# EAGLE board T06_preliminarySchematic_v3 (EAGLE 7.4.0)
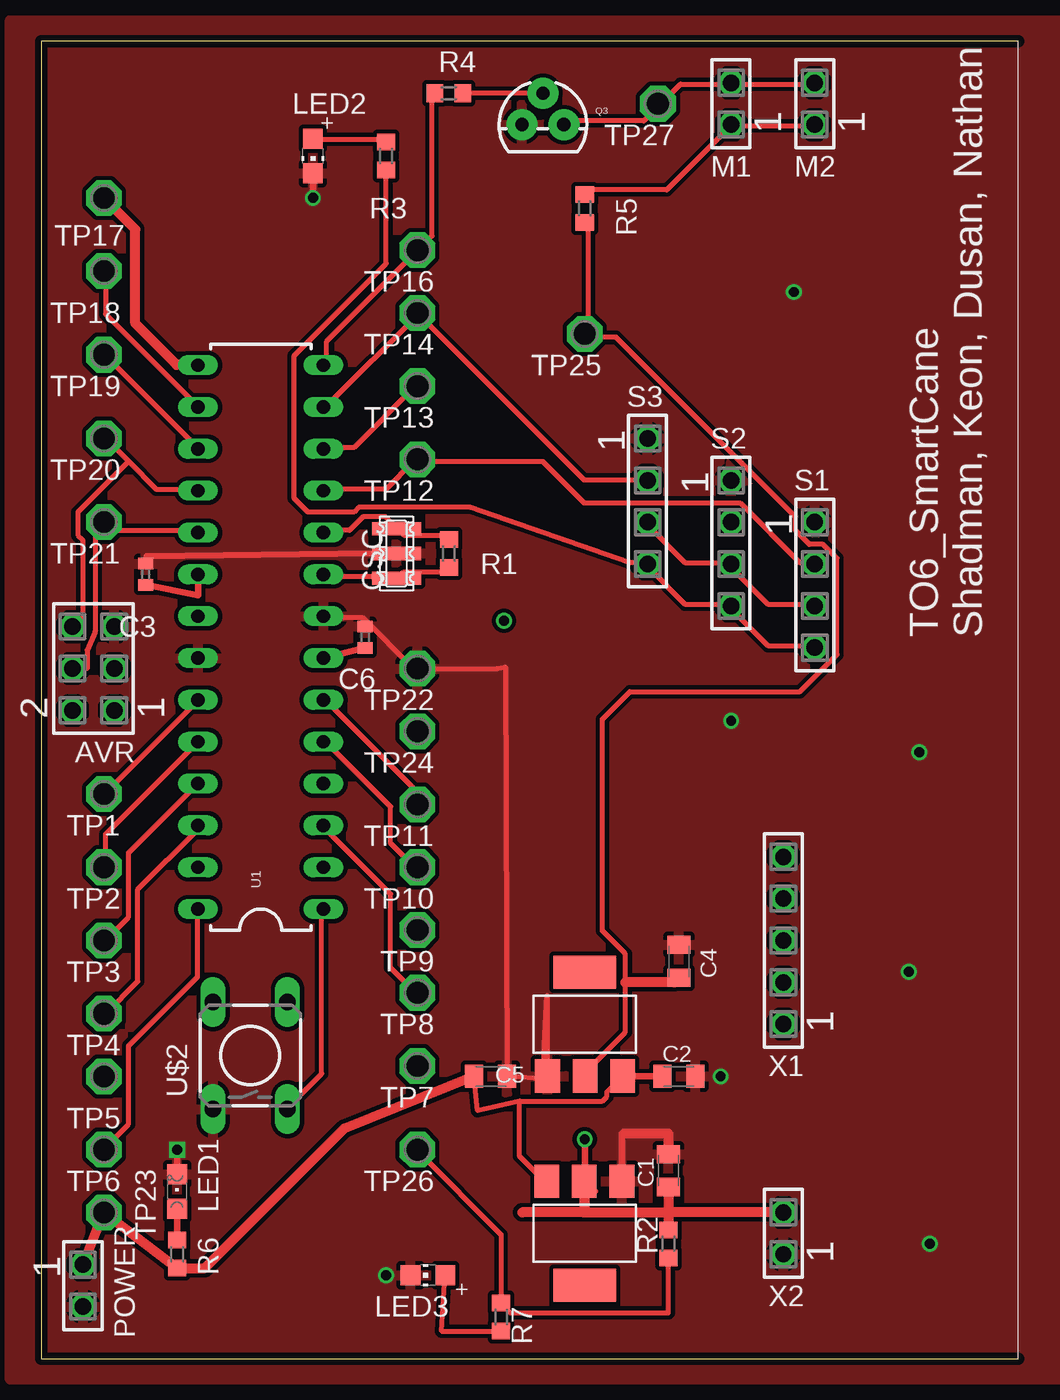
[diagram p0: board, top side]
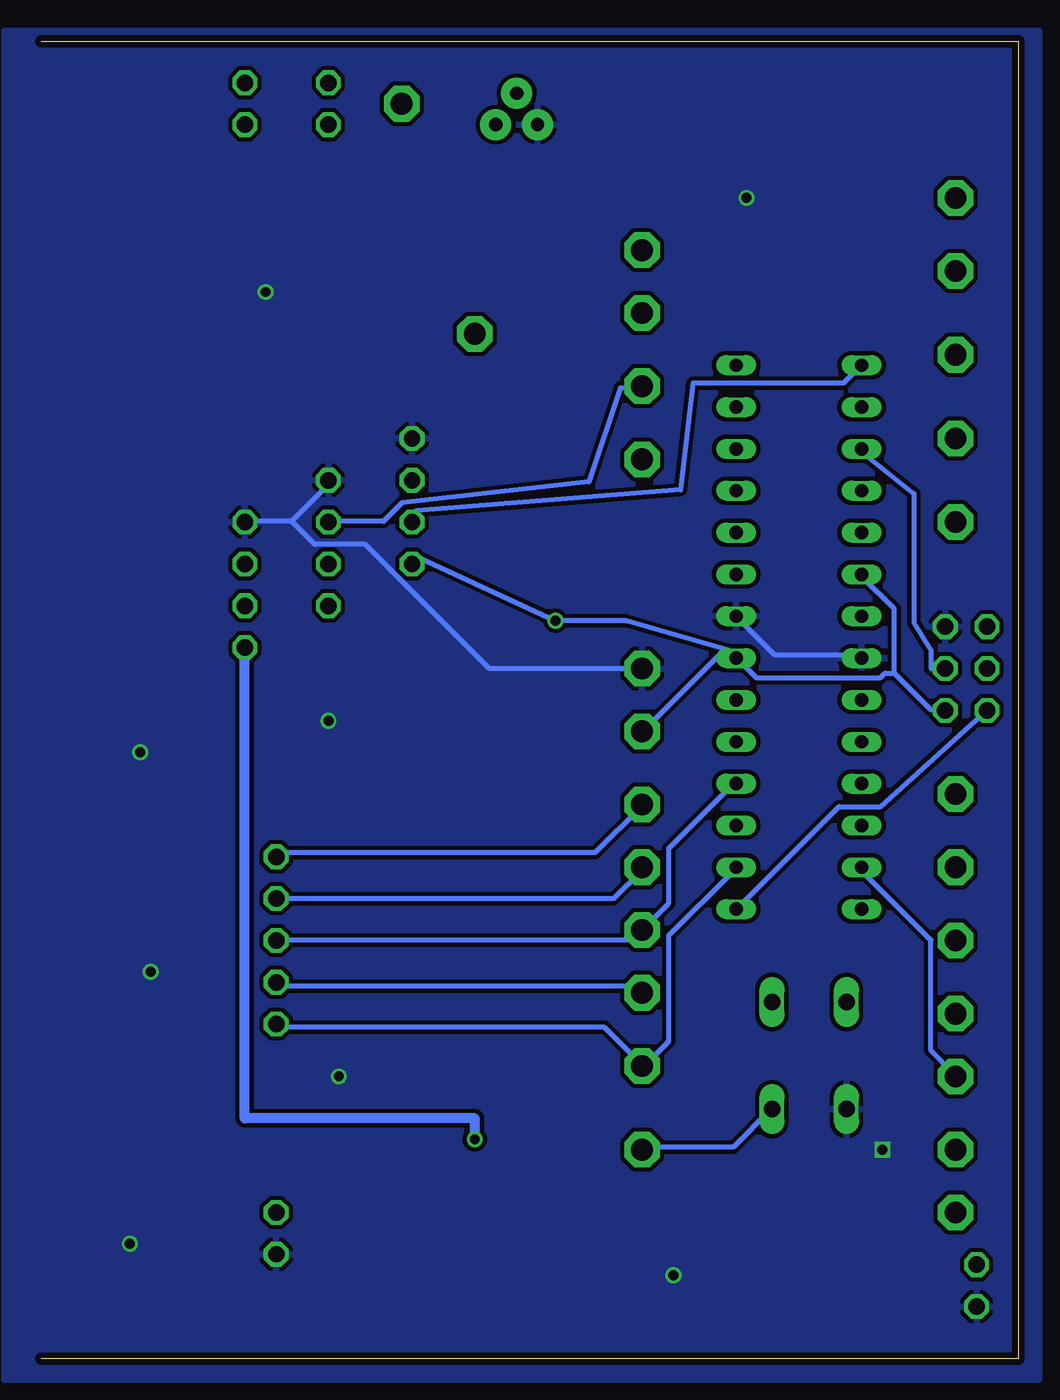
[diagram p1: board, bottom side, seen from below]

Size 59.36 x 80 mm. Coordinates in mm from the lower left corner, seen from the top.
Outline: 59.36,0 0,0 0,80 59.36,80
Copper layers (1*16): Top 0.0356mm / dielectric 1.5011mm / Bottom 0.0356mm
Design rules "LaenPCBOrder (1)": minimum track width 6mil, minimum drill 13mil, track to track 6mil, track to pad 6mil, pad to pad 6mil, via to via 6mil, smd to smd 6mil, copper to edge 15mil, drill to drill 6mil, minimum pad ring 7mil, minimum via ring 7mil, stop-mask expansion 3mil, vias tented up to drill 0mil, thermal gap 10mil
Net classes: 0 default: width 0.305 mm, drill 0.508 mm, clearance 0.254 mm

## Footprints (pad centres in the part's own frame; a part is rotated, then mirrored left to right if it is on the bottom)
SSW-103-02-S-D = drill 1 pad 1.5 octagon: 1 -2.54,-1.27; 2 -2.54,1.27; 3 0,-1.27; 4 0,1.27; 5 2.54,-1.27; 6 2.54,1.27
C0805K = smd 1.1 x 1.4: 1 -1,0; 2 1,0
C1005 = smd 0.7 x 0.9: 1 -0.65,0; 2 0.65,0
CSTCR-G = smd 0.8 x 3: 1 -1.5,0; 2 0,0; 3 1.5,0
CHIPLED_0805 = smd 1.2 x 1.2: A 0,-1.05; C 0,1.05
CHIP-LED0805 = smd 1.2 x 1.2: A 0,-1.05; C 0,1.05
SSW-102-02-S-S = drill 1 pad 1.5 octagon: 1 -1.27,0; 2 1.27,0
SOT223 = smd 1.499 x 2.007: 1 -2.261,-3.15; 2 0.025,-3.15; 3 2.311,-3.15 | smd 3.81 x 2.007: 4 0,3.15
TO-92 = drill 0.813 pad 1.88: 1 -1.27,0; 2 0,1.905; 3 1.27,0
R0603 = smd 1 x 1.1: 1 -0.85,0; 2 0.85,0
SSW-104-02-S-S = drill 1 pad 1.5 octagon: 1 -3.81,0; 2 -1.27,0; 3 1.27,0; 4 3.81,0
P1-13 = drill 1.321 pad 2.159 octagon: TP 0,0
DIL28-3 = drill 0.813 long: 1 -16.51,-3.81; 2 -13.97,-3.81; 3 -11.43,-3.81; 4 -8.89,-3.81; 5 -6.35,-3.81; 6 -3.81,-3.81; 7 -1.27,-3.81; 8 1.27,-3.81; 9 3.81,-3.81; 10 6.35,-3.81; 11 8.89,-3.81; 12 11.43,-3.81; 13 13.97,-3.81; 14 16.51,-3.81; 15 16.51,3.81; 16 13.97,3.81; 17 11.43,3.81; 18 8.89,3.81; 19 6.35,3.81; 20 3.81,3.81; 21 1.27,3.81; 22 -1.27,3.81; 23 -3.81,3.81; 24 -6.35,3.81; 25 -8.89,3.81; 26 -11.43,3.81; 27 -13.97,3.81; 28 -16.51,3.81
TAC-SWITCH-PTH = drill 1.016 pad 1.524 long: 1 -3.251,2.261; 2 3.251,2.261; 3 -3.251,-2.261; 4 3.251,-2.261
SSW-105-02-S-S = drill 1 pad 1.5 octagon: 1 -5.08,0; 2 -2.54,0; 3 0,0; 4 2.54,0; 5 5.08,0

## Placement (x,y rotation side)
AVR  SSW-103-02-S-D  [SSW-103-02-S-D]  3.17,41.91 90 top
C1  10u  [C0805K]  38.1,11.43 90 top
C2  10u  [C0805K]  38.73,17.14 0 top
C3  100n  [C1005]  6.35,47.62 90 top
C4  10u  [C0805K]  38.73,24.13 90 top
C5  10u  [C0805K]  27.3,17.14 0 top
C6  100n  [C1005]  19.68,43.81 90 top
CSC  16M  [CSTCR-G]  21.59,48.9 90 top
LED1  LTST-C171GKT  [CHIPLED_0805]  8.26,10.16 0 top
LED2  LTST-C171GKT  [CHIP-LED0805]  16.51,73.03 180 top
LED3  LTST-C170KFKT  [CHIP-LED0805]  23.5,5.08 90 top
M1  SSW-102-02-S-S  [SSW-102-02-S-S]  41.91,76.2 90 top
M2  SSW-102-02-S-S  [SSW-102-02-S-S]  46.99,76.2 90 top
NCP1117DT33T5GOSTR-ND  REG1117  [SOT223]  33.02,20.32 0 top
NCP1117DT50RKGOSTR-ND  REG1117  [SOT223]  33.02,7.62 180 top
POWER  SSW-102-02-S-S  [SSW-102-02-S-S]  2.54,4.45 270 top
Q3  2n3904  [TO-92]  30.48,74.93 0 top
R1  1M  [R0603]  24.77,48.9 270 top
R2  10K  [R0603]  38.1,6.99 90 top
R3  220  [R0603]  20.95,73.03 90 top
R4  500  [R0603]  24.77,76.83 0 top
R5  100  [R0603]  33.02,69.85 270 top
R6  220  [R0603]  8.26,6.35 90 top
R7  220  [R0603]  27.94,2.54 270 top
S1  SSW-104-02-S-S  [SSW-104-02-S-S]  46.99,46.99 270 top
S2  SSW-104-02-S-S  [SSW-104-02-S-S]  41.91,49.53 270 top
S3  SSW-104-02-S-S  [SSW-104-02-S-S]  36.83,52.07 270 top
TP1  TPPAD1-13  [P1-13]  3.81,34.29 180 top
TP2  TPPAD1-13  [P1-13]  3.81,29.84 180 top
TP3  TPPAD1-13  [P1-13]  3.81,25.4 180 top
TP4  TPPAD1-13  [P1-13]  3.81,20.95 180 top
TP5  TPPAD1-13  [P1-13]  3.81,17.14 180 top
TP6  TPPAD1-13  [P1-13]  3.81,12.7 180 top
TP7  TPPAD1-13  [P1-13]  22.86,17.78 180 top
TP8  TPPAD1-13  [P1-13]  22.86,22.23 180 top
TP9  TPPAD1-13  [P1-13]  22.86,26.04 180 top
TP10  TPPAD1-13  [P1-13]  22.86,29.84 180 top
TP11  TPPAD1-13  [P1-13]  22.86,33.66 180 top
TP12  TPPAD1-13  [P1-13]  22.86,54.61 180 top
TP13  TPPAD1-13  [P1-13]  22.86,59.05 180 top
TP14  TPPAD1-13  [P1-13]  22.86,63.5 180 top
TP16  TPPAD1-13  [P1-13]  22.86,67.31 180 top
TP17  TPPAD1-13  [P1-13]  3.81,70.48 90 top
TP18  TPPAD1-13  [P1-13]  3.81,66.04 180 top
TP19  TPPAD1-13  [P1-13]  3.81,60.96 180 top
TP20  TPPAD1-13  [P1-13]  3.81,55.88 180 top
TP21  TPPAD1-13  [P1-13]  3.81,50.8 180 top
TP22  TPPAD1-13  [P1-13]  22.86,41.91 180 top
TP23  TPPAD1-13  [P1-13]  3.81,8.89 180 top
TP24  TPPAD1-13  [P1-13]  22.86,38.1 180 top
TP25  TPPAD1-13  [P1-13]  33.02,62.23 180 top
TP26  TPPAD1-13  [P1-13]  22.86,12.7 180 top
TP27  TPPAD1-13  [P1-13]  37.47,76.2 180 top
U1  ATMEGA328P_PDIP  [DIL28-3]  13.34,43.81 90 top
U$2  TACTILE-SWITCH-PTH  [TAC-SWITCH-PTH]  12.7,18.41 90 top
X1  SSW-105-02-S-S  [SSW-105-02-S-S]  45.09,25.4 90 top
X2  SSW-102-02-S-S  [SSW-102-02-S-S]  45.09,7.62 90 top

## Library data of the parts
AVR = con-samtec; MPN: SSW-103-02-S-D; OC_FARNELL: unknown; OC_NEWARK: 11P9365
C1 C2 C4 C5 CSC LED1-LED3 = adafruit
C3 C6 = eagle-ltspice; SPICEMODEL: NONE; SPICEPREFIX: C
M1 M2 POWER X2 = con-samtec; MPN: SSW-102-02-S-S; OC_FARNELL: unknown; OC_NEWARK: 11P9351
NCP1117DT33T5GOSTR-ND NCP1117DT50RKGOSTR-ND = burr-brown; MPN: REG1117; OC_FARNELL: 1097566; OC_NEWARK: 14P6981
Q3 = SparkFun-DiscreteSemi; PROD_ID: TRANS-08447
R1-R7 = eagle-ltspice; SPICEMODEL: NONE; SPICEPREFIX: R
S1-S3 = con-samtec; MPN: SSW-104-02-S-S; OC_FARNELL: unknown; OC_NEWARK: 11P9384
TP1-TP14 TP16-TP27 = testpad
U1 = SparkFun-DigitalIC
U$2 = GeekAmmo
X1 = con-samtec; MPN: SSW-105-02-S-S; OC_FARNELL: unknown; OC_NEWARK: 11P9399

## Nets
+3V3: C4.1 NCP1117DT33T5GOSTR-ND.2 R5.2 TP25.TP
+5V: AVR.1 C1.1 C3.1 C6.1 NCP1117DT50RKGOSTR-ND.2 R2.2 R3.1 S1.4 S2.4 S3.4 TP24.TP U1.7 U1.20 X2.2
+9V: C2.1 C5.1 NCP1117DT33T5GOSTR-ND.3 NCP1117DT50RKGOSTR-ND.3 POWER.1 R6.1 TP23.TP
BU0: TP7.TP U1.2 X1.1
BU1: TP8.TP U1.3 X1.2
BU2: TP9.TP U1.4 X1.3
BU3: TP10.TP U1.5 X1.4
BU4: TP11.TP U1.6 X1.5
D16: TP18.TP U1.16
ECHO1: S1.2 TP12.TP U1.11
ECHO2: S2.2 TP13.TP U1.12
ECHO3: S3.2 TP14.TP U1.13
GND: AVR.5 C1.2 C2.2 C3.2 C4.2 C5.2 C6.2 CSC.2 LED1.C LED2.C LED3.C NCP1117DT33T5GOSTR-ND.1 NCP1117DT50RKGOSTR-ND.1 POWER.2 Q3.1 S1.1 S2.1 S3.1 TP22.TP U1.8 U1.22 U$2.1 X2.1
MISO: AVR.6 TP20.TP U1.18
MOSI: AVR.3 TP19.TP U1.17
MOTOR: R4.1 TP16.TP U1.14
N$1: CSC.3 R1.1 U1.10
N$2: CSC.1 R1.2 U1.9
N$3: TP1.TP U1.23
N$4: TP2.TP U1.24
N$5: M1.1 M2.1 R5.1
N$6: TP3.TP U1.25
N$7: LED1.A R6.2
N$8: LED2.A R3.2
N$9: LED3.A R7.2
N$10: Q3.2 R4.2
N$11: M1.2 M2.2 Q3.3 TP27.TP
N$12: TP4.TP U1.26
N$13: TP5.TP U1.27
N$14: TP6.TP U1.28
RESET: AVR.2 R2.1 R7.1 TP26.TP U1.1 U$2.3
SCK: AVR.4 TP21.TP U1.19
TRIG: S1.3 S2.3 S3.3 TP17.TP U1.15

## Tracks (layer width: path | path; a pad name or v marks a point on that pad's centre or on a via)
+3V3
  Top 0.305: R5.2 33.25,68.73 33.25,62.31 TP25.TP 33.25,62.03 34.92,62.03 45.82,51.13 45.82,50.29 46.66,49.45 47.5,49.45 48.34,48.62 48.34,42.75 46.1,40.51 35.76,40.51 34.09,38.84 34.09,25.98 35.48,24.59 35.48,22.86 35.48,19.84 32.97,17.32 NCP1117DT33T5GOSTR-ND.2
  Top 0.406: C4.1 38.47,22.86
  Top 0.61: 38.47,22.86 35.48,22.86
+5V  (via drill 0.6 pad 0.61, 0.61)
  Top 0.305: 32.97,10.62 NCP1117DT50RKGOSTR-ND.2 | R3.1 20.95,66.5 15.37,60.91 15.37,52.25 16.2,51.41 19,51.41 19.28,51.69 26.06,51.69 35.76,48.34 36.6,48.34 S3.4 36.88,48.06 39.12,45.82 41.91,45.82 S2.4 41.91,45.54 44.15,43.31 46.94,43.31 S1.4 | 9.53,46.35 9.51,46.37
  Top 0.406: C3.1 9.51,46.37 | 9.53,46.35 U1.20 | C6.1 U1.7 | NCP1117DT50RKGOSTR-ND.2 33.6,10.16 33.66,10.16 33.02,10.79 v33.02,13.34
  Top 0.61: C1.1 38.1,8.89 | 38.1,8.89 R2.2 | 32.97,10.62 32.97,8.89 38.1,8.89 | NCP1117DT50RKGOSTR-ND.2 32.99,8.89 29.21,8.89 | X2.2 38.1,8.89 | C3.1
  Bottom 0.305: 7.54,41.63 7.54,45.54 9.5,47.5 U1.20 | 7.54,41.63 5.31,39.4 AVR.1 | 17.6,43.03 17.32,42.75 U1.7 | 17.6,43.03 23.82,44.81 v28.12,44.81 36.32,48.62 36.6,48.34 S3.4 | 17.6,43.03 17.88,43.03 22.63,38.28 TP24.TP | 17.6,43.03 U1.7 | 7.54,41.63 8.1,41.63 8.38,41.35 15.93,41.35 17.04,42.47 U1.7
  Bottom 0.61: v33.02,13.34 33.02,14.61 46.99,14.61 S1.4
+9V
  Top 0.305: 29.06,15.65 29.06,12.29 30.45,10.9 NCP1117DT50RKGOSTR-ND.3 | 29.06,15.65 26.52,15.06 C5.1 | NCP1117DT33T5GOSTR-ND.3 34.37,16.2 34.37,15.93 34.09,15.65 29.06,15.65
  Top 0.406: NCP1117DT33T5GOSTR-ND.3 37.1,17.17 C2.1
  Top 0.61: C5.1 18.41,13.97 9.95,5.5 R6.1 TP23.TP POWER.1
BU0
  Bottom 0.305: U1.2 17.32,29.62 21.23,25.7 21.23,19.28 22.63,17.88 TP7.TP 22.91,17.88 25.15,20.12 44.98,20.12 X1.1
BU1
  Top 0.305: U1.3 17.32,32.13 21.23,28.22 21.23,23.75 22.63,22.35 TP8.TP
  Bottom 0.305: X1.2 44.98,22.63 23.19,22.63 22.91,22.35 TP8.TP
BU2
  Bottom 0.305: U1.4 17.32,34.92 21.23,31.01 21.23,27.66 TP9.TP 23.47,25.43 44.98,25.43 X1.3
BU3
  Top 0.305: U1.5 17.32,37.44 21.23,33.53 21.23,31.29 22.63,29.9 TP10.TP
  Bottom 0.305: X1.4 24.59,27.94 22.91,29.62 TP10.TP
BU4
  Top 0.305: U1.6 17.32,39.95 22.63,34.65 22.63,33.81 TP11.TP
  Bottom 0.305: X1.5 44.98,30.73 25.7,30.73 22.91,33.53 TP11.TP
D16
  Top 0.305: U1.16 9.5,57.84 3.91,63.42 3.91,65.94 TP18.TP
ECHO1
  Top 0.305: U1.11 17.32,52.81 20.95,52.81 22.63,54.48 TP12.TP 22.91,54.48 30.45,54.48 32.97,51.97 42.47,51.97 46.1,48.34 46.94,48.34 S1.2
ECHO2
  Top 0.305: U1.12 17.32,55.32 19,55.32 22.63,58.95 TP13.TP
  Bottom 0.305: S2.2 41.91,50.85 38.56,50.85 37.44,51.97 26.09,53.24 24.18,58.95 TP13.TP
ECHO3
  Top 0.305: 22.91,63.42 17.32,57.84 U1.13 | 22.91,63.42 32.97,53.37 36.6,53.37 S3.2 | 22.91,63.42 TP14.TP
GND  (via drill 0.6)
  Top 0.305: 35.48,10.9 NCP1117DT50RKGOSTR-ND.1 | CSC.2 20.34,48.9 | 6.4,48.74 C3.2 | 16.48,72.08 LED2.C | NCP1117DT33T5GOSTR-ND.1 30.73,17.32 30.73,22.07 30.45,16.64 31.09,16.69 30.73,16.97 C5.2 28.19,42.01 27.66,41.91 TP22.TP 22.63,41.91 19.56,44.98 17.32,44.98 U1.8
  Top 0.406: LED1.C v8.26,12.7 | LED2.C v16.51,70.48 | 35.42,13.69 35.28,13.69 NCP1117DT50RKGOSTR-ND.1 | 6.4,48.74 20.34,48.9
  Top 0.61: 35.42,13.69 38.1,13.69 C1.2
  Bottom 0.305: 44.15,50.85 46.94,50.85 S1.1 | 44.15,50.85 41.91,53.09 S2.1 | 10.62,15.09 U$2.1 | U1.8 14.81,42.75 9.78,42.75 U1.22 | 44.15,50.85 42.75,49.45 39.67,49.45 32.13,41.91 TP22.TP
  other vias: 41.27,17.14 41.91,38.73 20.95,5.08 53.34,36.83 52.7,23.5 53.98,6.99 45.72,64.77
  pour Bottom: -1.27,80.64 61.59,80.64 61.59,-1.27 -1.27,-1.27 -1.27,1.91
  pour Top: -1.91,81.28 62.23,81.28 62.23,-1.27 -1.91,-1.27 -1.91,-0.64 -1.91,80.64
MISO
  Top 0.305: 5.31,54.48 3.91,55.88 TP20.TP | 5.31,54.48 6.99,52.81 9.5,52.81 U1.18 | 5.31,54.48 2.23,51.41 2.23,50.01 2.52,49.73 2.52,44.7 AVR.6
MOSI
  Top 0.305: U1.17 9.5,55.32 3.91,60.91 TP19.TP
  Bottom 0.305: AVR.3 5.31,41.91 5.31,43.03 6.35,44.7 6.35,52.53 9.5,55.04 U1.17
MOTOR
  Top 0.305: R4.1 23.75,76.83 23.75,68.17 22.91,67.33 TP16.TP 22.63,67.06 17.32,61.75 17.32,60.35 U1.14
N$1
  Top 0.305: R1.1 24.54,50.01 22.02,50.01 21.74,50.29 CSC.3 21.46,50.57 20.9,51.13 19.56,51.13 18.72,50.29 17.32,50.29 U1.10
N$2
  Top 0.305: R1.2 24.54,47.78 22.02,47.78 21.74,47.5 CSC.1 21.46,47.5 17.32,47.5 U1.9
N$3
  Top 0.305: U1.23 9.5,39.95 3.91,34.37 TP1.TP
N$4
  Top 0.305: U1.24 3.91,31.85 3.91,29.9 TP2.TP
N$5
  Top 0.305: 41.91,74.88 38,70.97 33.25,70.97 R5.1 | 41.91,74.88 46.94,74.88 M2.1 | 41.91,74.88 M1.1
N$6
  Top 0.305: U1.25 9.5,34.92 5.31,30.73 5.31,26.82 3.91,25.43 TP3.TP
N$7
  Top 0.406: LED1.A R6.2
N$8
  Top 0.305: R3.2 20.95,74.04 16.76,74.04 LED2.A
N$9
  Top 0.305: R7.2 27.94,1.68 24.33,1.68 LED3.A
N$10
  Top 0.305: Q3.2 R4.2
N$11
  Top 0.305: 41.91,77.39 38.84,77.39 37.72,76.28 TP27.TP 37.44,76 36.6,75.16 31.85,75.16 Q3.3 | 41.91,77.39 46.94,77.39 M2.2 | 41.91,77.39 M1.2
N$12
  Top 0.305: U1.26 9.5,32.13 5.87,28.5 5.87,22.91 3.91,20.95 TP4.TP
N$13
  Bottom 0.305: U1.27 9.5,29.62 5.31,25.43 5.31,18.72 3.91,17.32 TP5.TP
N$14
  Top 0.305: U1.28 9.5,27.1 9.5,23.19 5.31,19 5.31,14.25 3.91,12.85 TP6.TP
RESET
  Top 0.305: TP26.TP 22.91,12.57 27.94,7.54 R7.1 27.94,3.35 28.5,2.79 38.1,2.79 R2.1 | U1.1 17.04,27.1 17.04,17.32 15.09,15.37 U$2.3
  Bottom 0.305: AVR.2 8.38,33.53 10.9,33.53 17.04,27.38 U1.1 | TP26.TP 22.63,12.85 17.32,12.85 15.09,15.09 U$2.3
SCK
  Top 0.305: 3.28,50.57 4.19,50.29 9.5,50.29 U1.19 | 3.28,50.57 3.28,44.15 2.79,43.03 2.79,41.91 AVR.4 | 3.28,50.57 TP21.TP
TRIG
  Top 0.305: S3.3 36.88,50.57 39.12,48.34 41.91,48.34 S2.3 41.91,48.06 44.15,45.82 46.94,45.82 S1.3 | 9.5,60.35 U1.15 | 3.91,70.41 TP17.TP
  Top 0.61: 9.5,60.35 8.23,60.35 5.71,62.87 5.71,68.58 TP17.TP
  Bottom 0.305: U1.15 10.62,59.23 19.76,59.23 20.52,52.76 36.6,51.49 S3.3

## Text on the board
tNames: TO6_SmartCane / Shadman, Keon, Dusan, Nathan